# EAGLE board Display_01 (EAGLE 5.07)
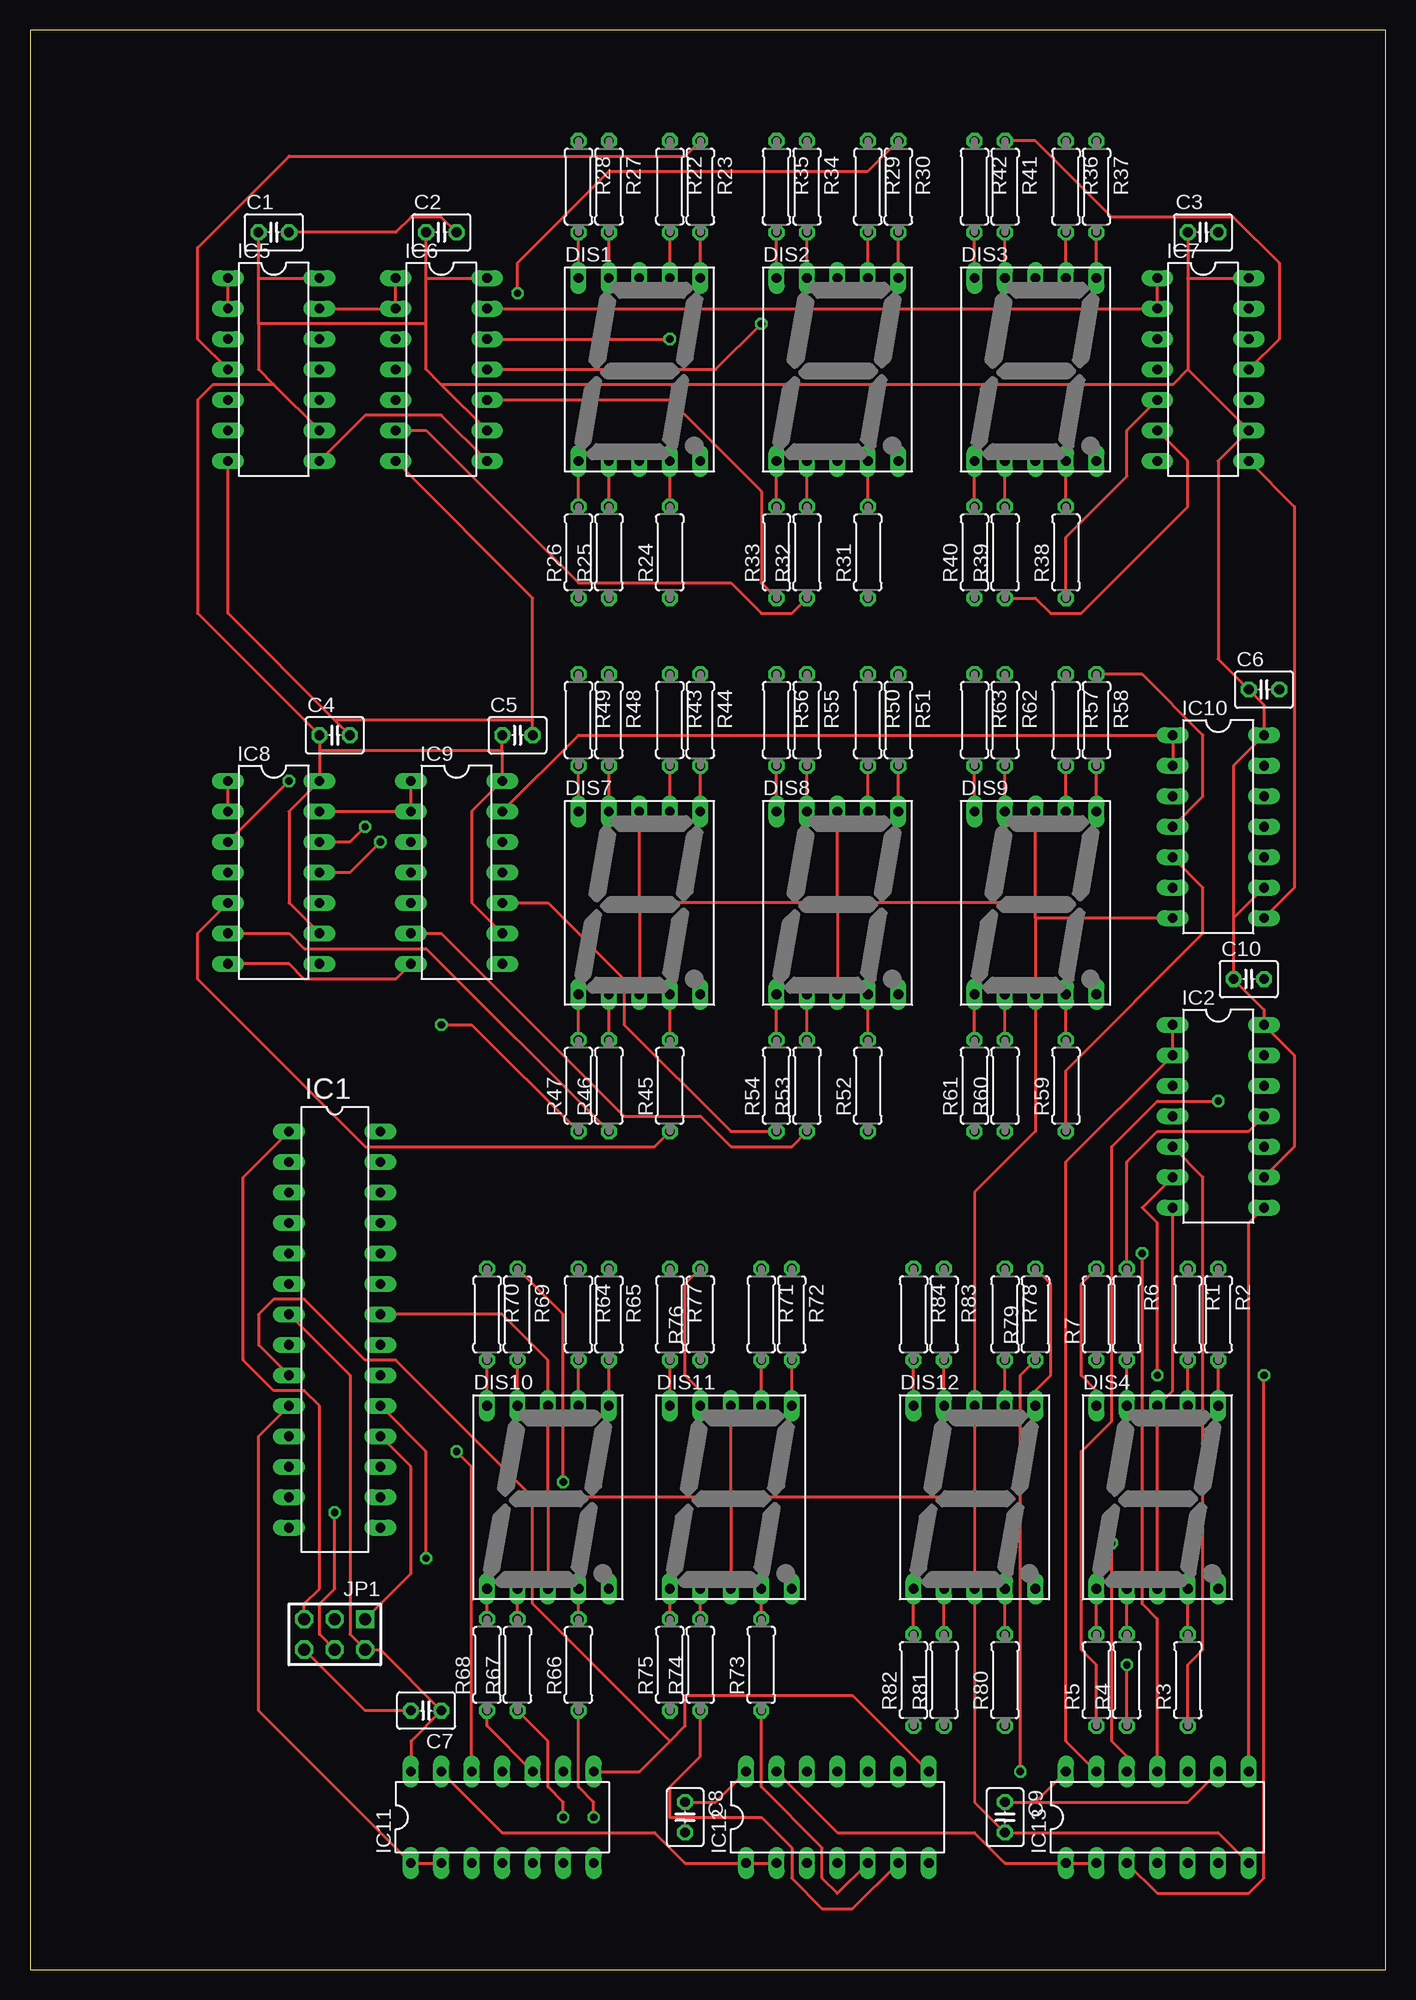
[diagram p0: board, top side]
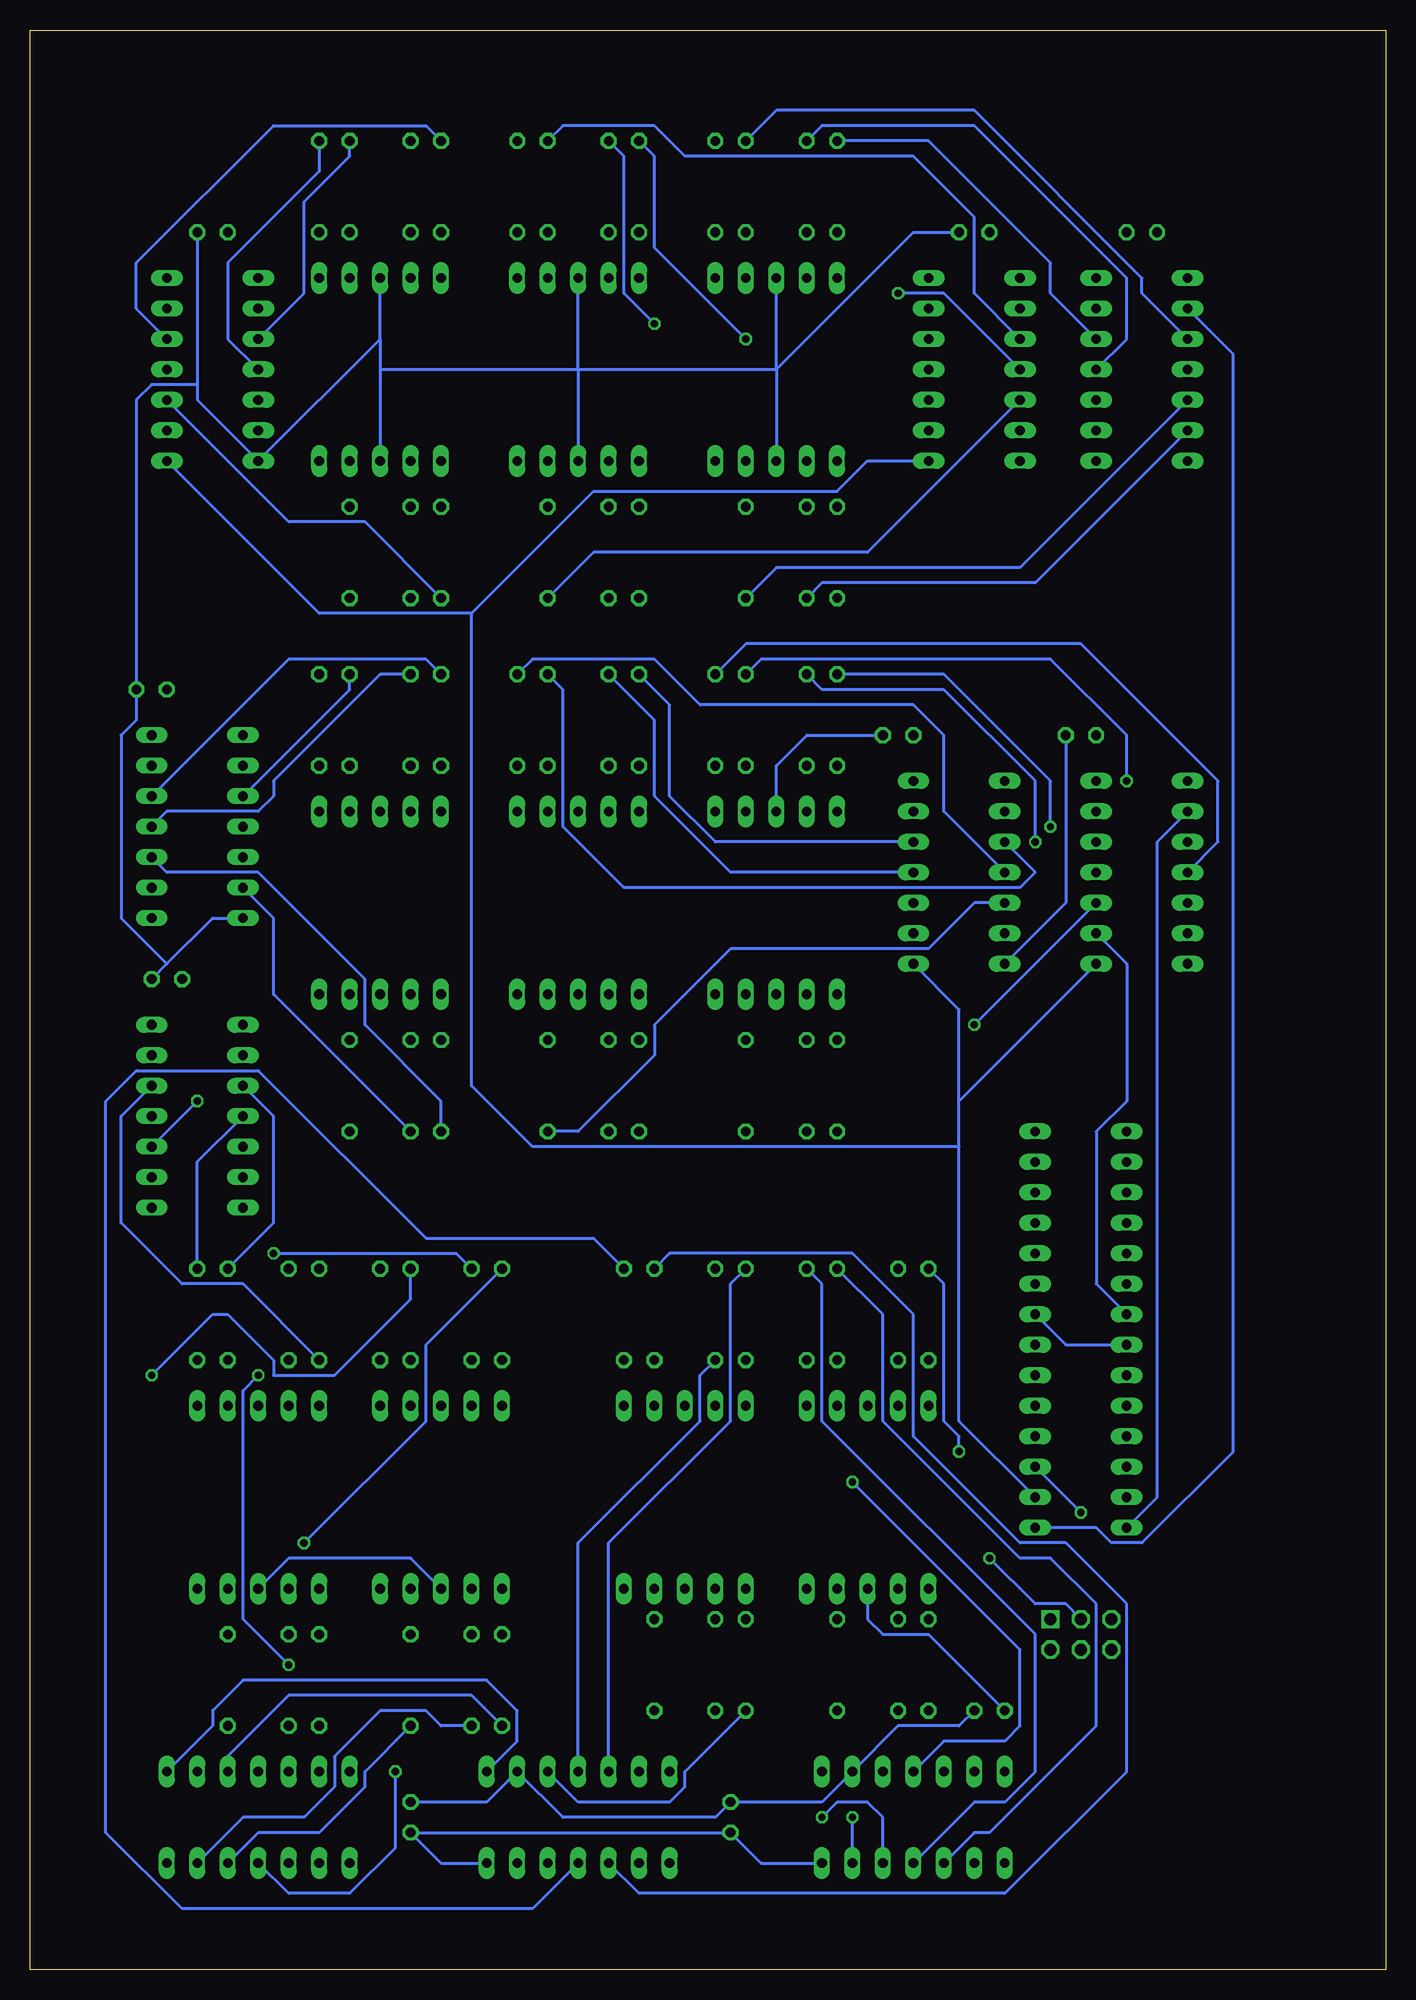
[diagram p1: board, bottom side, seen from below]

Size 113.01 x 161.64 mm. Coordinates in mm from the lower left corner, seen from the top.
Outline: 0,0 113.01,0 113.01,161.64 0,161.64 0,0
Copper layers (1*16): Top 0.035mm / dielectric 1.5mm / Bottom 0.035mm
Design rules "default *": minimum track width 10mil, minimum drill 24mil, track to track 15mil, track to pad 15mil, pad to pad 15mil, via to via 15mil, smd to smd 8mil, copper to edge 40mil, drill to drill 8mil, minimum pad ring 10mil, minimum via ring 8mil, stop-mask expansion 4mil, vias tented up to drill 0mil, thermal gap 10mil

## Footprints (pad centres in the part's own frame; a part is rotated, then mirrored left to right if it is on the bottom)
C025-030X050 = drill 0.813 octagon: 1 -1.27,0; 2 1.27,0
HDSP-M = drill 0.813 long: 1 -5.08,-7.62; 2 -2.54,-7.62; 3 0,-7.62; 4 2.54,-7.62; 5 5.08,-7.62; 6 5.08,7.62; 7 2.54,7.62; 8 0,7.62; 9 -2.54,7.62; 10 -5.08,7.62
DIL28-3 = drill 0.813 long: 1 -16.51,-3.81; 2 -13.97,-3.81; 3 -11.43,-3.81; 4 -8.89,-3.81; 5 -6.35,-3.81; 6 -3.81,-3.81; 7 -1.27,-3.81; 8 1.27,-3.81; 9 3.81,-3.81; 10 6.35,-3.81; 11 8.89,-3.81; 12 11.43,-3.81; 13 13.97,-3.81; 14 16.51,-3.81; 15 16.51,3.81; 16 13.97,3.81; 17 11.43,3.81; 18 8.89,3.81; 19 6.35,3.81; 20 3.81,3.81; 21 1.27,3.81; 22 -1.27,3.81; 23 -3.81,3.81; 24 -6.35,3.81; 25 -8.89,3.81; 26 -11.43,3.81; 27 -13.97,3.81; 28 -16.51,3.81
DIL14 = drill 0.813 long: 1 -7.62,-3.81; 2 -5.08,-3.81; 3 -2.54,-3.81; 4 0,-3.81; 5 2.54,-3.81; 6 5.08,-3.81; 7 7.62,-3.81; 8 7.62,3.81; 9 5.08,3.81; 10 2.54,3.81; 11 0,3.81; 12 -2.54,3.81; 13 -5.08,3.81; 14 -7.62,3.81
AVR-ISP-6 = drill 1.016 square: 1 -2.54,-1.27 | drill 1.016 octagon: 2 -2.54,1.27; 3 0,-1.27; 4 0,1.27; 5 2.54,-1.27; 6 2.54,1.27
0207/7 = drill 0.813 octagon: 1 -3.81,0; 2 3.81,0

## Placement (x,y rotation side)
C1  [C025-030X050]  20.32,144.78 0 top
C2  [C025-030X050]  34.29,144.78 0 top
C3  [C025-030X050]  97.79,144.78 0 top
C4  [C025-030X050]  25.4,102.87 0 top
C5  [C025-030X050]  40.64,102.87 0 top
C6  [C025-030X050]  102.87,106.68 0 top
C7  [C025-030X050]  33.02,21.59 180 top
C8  [C025-030X050]  54.61,12.7 270 top
C9  [C025-030X050]  81.28,12.7 270 top
C10  [C025-030X050]  101.6,82.55 0 top
DIS1  HD-H103  [HDSP-M]  50.8,133.35 0 top
DIS2  HD-H103  [HDSP-M]  67.31,133.35 0 top
DIS3  HD-H103  [HDSP-M]  83.82,133.35 0 top
DIS4  HD-H103  [HDSP-M]  93.98,39.37 0 top
DIS7  HD-H103  [HDSP-M]  50.8,88.9 0 top
DIS8  HD-H103  [HDSP-M]  67.31,88.9 0 top
DIS9  HD-H103  [HDSP-M]  83.82,88.9 0 top
DIS10  HD-H103  [HDSP-M]  43.18,39.37 0 top
DIS11  HD-H103  [HDSP-M]  58.42,39.37 0 top
DIS12  HD-H103  [HDSP-M]  78.74,39.37 0 top
IC1  ATMEGA48/88/168-PU  [DIL28-3]  25.4,53.34 270 top
IC2  74LS164N  [DIL14]  99.06,71.12 270 top
IC5  74LS164N  [DIL14]  20.32,133.35 270 top
IC6  74LS164N  [DIL14]  34.29,133.35 270 top
IC7  74LS164N  [DIL14]  97.79,133.35 270 top
IC8  74LS164N  [DIL14]  20.32,91.44 270 top
IC9  74LS164N  [DIL14]  35.56,91.44 270 top
IC10  74LS164N  [DIL14]  99.06,95.25 270 top
IC11  74LS164N  [DIL14]  39.37,12.7 0 top
IC12  74LS164N  [DIL14]  67.31,12.7 0 top
IC13  74LS164N  [DIL14]  93.98,12.7 0 top
JP1  AVR-ISP-6  [AVR-ISP-6]  25.4,27.94 180 top
R1  [0207/7]  96.52,54.61 270 top
R2  [0207/7]  99.06,54.61 270 top
R3  [0207/7]  96.52,24.13 90 top
R4  [0207/7]  91.44,24.13 90 top
R5  [0207/7]  88.9,24.13 90 top
R6  [0207/7]  91.44,54.61 270 top
R7  [0207/7]  88.9,54.61 90 top
R22  [0207/7]  53.34,148.59 270 top
R23  [0207/7]  55.88,148.59 270 top
R24  [0207/7]  53.34,118.11 90 top
R25  [0207/7]  48.26,118.11 90 top
R26  [0207/7]  45.72,118.11 90 top
R27  [0207/7]  48.26,148.59 270 top
R28  [0207/7]  45.72,148.59 270 top
R29  [0207/7]  69.85,148.59 270 top
R30  [0207/7]  72.39,148.59 270 top
R31  [0207/7]  69.85,118.11 90 top
R32  [0207/7]  64.77,118.11 90 top
R33  [0207/7]  62.23,118.11 90 top
R34  [0207/7]  64.77,148.59 270 top
R35  [0207/7]  62.23,148.59 270 top
R36  [0207/7]  86.36,148.59 270 top
R37  [0207/7]  88.9,148.59 270 top
R38  [0207/7]  86.36,118.11 90 top
R39  [0207/7]  81.28,118.11 90 top
R40  [0207/7]  78.74,118.11 90 top
R41  [0207/7]  81.28,148.59 270 top
R42  [0207/7]  78.74,148.59 270 top
R43  [0207/7]  53.34,104.14 270 top
R44  [0207/7]  55.88,104.14 270 top
R45  [0207/7]  53.34,73.66 90 top
R46  [0207/7]  48.26,73.66 90 top
R47  [0207/7]  45.72,73.66 90 top
R48  [0207/7]  48.26,104.14 270 top
R49  [0207/7]  45.72,104.14 270 top
R50  [0207/7]  69.85,104.14 270 top
R51  [0207/7]  72.39,104.14 270 top
R52  [0207/7]  69.85,73.66 90 top
R53  [0207/7]  64.77,73.66 90 top
R54  [0207/7]  62.23,73.66 90 top
R55  [0207/7]  64.77,104.14 270 top
R56  [0207/7]  62.23,104.14 270 top
R57  [0207/7]  86.36,104.14 270 top
R58  [0207/7]  88.9,104.14 270 top
R59  [0207/7]  86.36,73.66 90 top
R60  [0207/7]  81.28,73.66 90 top
R61  [0207/7]  78.74,73.66 90 top
R62  [0207/7]  81.28,104.14 270 top
R63  [0207/7]  78.74,104.14 270 top
R64  [0207/7]  45.72,54.61 270 top
R65  [0207/7]  48.26,54.61 270 top
R66  [0207/7]  45.72,25.4 90 top
R67  [0207/7]  40.64,25.4 90 top
R68  [0207/7]  38.1,25.4 90 top
R69  [0207/7]  40.64,54.61 270 top
R70  [0207/7]  38.1,54.61 270 top
R71  [0207/7]  60.96,54.61 270 top
R72  [0207/7]  63.5,54.61 270 top
R73  [0207/7]  60.96,25.4 90 top
R74  [0207/7]  55.88,25.4 90 top
R75  [0207/7]  53.34,25.4 90 top
R76  [0207/7]  55.88,54.61 90 top
R77  [0207/7]  53.34,54.61 270 top
R78  [0207/7]  81.28,54.61 270 top
R79  [0207/7]  83.82,54.61 90 top
R80  [0207/7]  81.28,24.13 90 top
R81  [0207/7]  76.2,24.13 90 top
R82  [0207/7]  73.66,24.13 90 top
R83  [0207/7]  76.2,54.61 270 top
R84  [0207/7]  73.66,54.61 270 top

## Library data of the parts
C1-C10 = rcl
DIS1-DIS4 DIS7-DIS12 = display-hp
IC1 = atmega8
IC2 IC5-IC13 = 74xx-eu
JP1 = avr-6
R1-R7 R22-R84 = resistor

## Nets
+5V: C1.1 C2.1 C3.1 C4.1 C5.1 C6.1 C7.1 C8.1 C9.1 C10.1 IC1.7 IC2.9 IC2.14 IC5.9 IC5.14 IC6.9 IC6.14 IC7.9 IC7.14 IC8.9 IC8.14 IC9.9 IC9.14 IC10.9 IC10.14 IC11.9 IC11.14 IC12.9 IC12.14 IC13.9 IC13.14 JP1.2
GND: C1.2 C2.2 C3.2 C4.2 C5.2 C6.2 C7.2 C8.2 C9.2 C10.2 DIS1.3 DIS1.8 DIS2.3 DIS2.8 DIS3.3 DIS3.8 DIS4.3 DIS4.8 DIS7.3 DIS7.8 DIS8.3 DIS8.8 DIS9.3 DIS9.8 DIS10.3 DIS10.8 DIS11.3 DIS11.8 DIS12.3 DIS12.8 IC1.8 IC1.22 IC2.7 IC5.7 IC6.7 IC7.7 IC8.7 IC9.7 IC10.7 IC11.7 IC12.7 IC13.7 JP1.6
N$1: IC2.1 IC2.2 IC13.13
N$2: IC2.6 R4.1
N$3: IC2.5 R3.1
N$4: IC2.4 R2.1
N$5: IC2.3 R1.1
N$6: IC2.10 R5.1
N$7: IC2.12 R7.1
N$8: IC2.11 R6.1
N$9: IC1.19 JP1.3
N$10: IC11.10 R68.1
N$11: DIS4.7 R1.2
N$12: DIS4.6 R2.2
N$13: DIS4.4 R3.2
N$14: DIS4.2 R4.2
N$15: DIS4.1 R5.2
N$16: DIS4.9 R6.2
N$17: DIS4.10 R7.2
N$18: IC1.17 JP1.4
N$19: IC1.18 JP1.1
N$20: IC1.15 IC5.1 IC5.2
N$21: IC1.1 JP1.5
N$22: IC1.9 IC2.8 IC11.8 IC12.8 IC13.8
N$23: IC1.10 IC11.1 IC11.2
N$24: IC8.10 R47.1
N$25: IC8.13 IC9.1 IC9.2
N$33: IC5.6 R25.1
N$50: IC5.5 R24.1
N$52: IC5.4 R23.1
N$53: IC5.3 R22.1
N$55: IC5.12 R28.1
N$56: IC5.11 R27.1
N$57: DIS1.7 R22.2
N$58: DIS1.6 R23.2
N$59: DIS1.4 R24.2
N$60: DIS1.2 R25.2
N$61: DIS1.1 R26.2
N$62: DIS1.9 R27.2
N$63: DIS1.10 R28.2
N$64: IC5.13 IC6.1 IC6.2
N$65: IC1.14 IC8.1 IC8.2
N$66: IC8.6 R46.1
N$67: IC6.6 R32.1
N$68: IC6.5 R31.1
N$69: IC6.4 R30.1
N$70: IC6.3 R29.1
N$71: IC6.10 R33.1
N$72: IC6.12 R35.1
N$73: IC6.11 R34.1
N$74: IC6.13 IC7.1 IC7.2
N$75: IC8.5 R45.1
N$76: IC8.4 R44.1
N$77: DIS2.7 R29.2
N$78: DIS2.6 R30.2
N$79: DIS2.4 R31.2
N$80: DIS2.2 R32.2
N$81: DIS2.1 R33.2
N$82: DIS2.9 R34.2
N$83: DIS2.10 R35.2
N$84: IC7.6 R39.1
N$85: IC7.5 R38.1
N$86: IC7.4 R37.1
N$87: IC7.3 R36.1
N$88: IC7.10 R40.1
N$89: IC7.12 R42.1
N$90: IC7.11 R41.1
N$92: IC8.3 R43.1
N$93: IC1.16 IC5.8 IC6.8 IC7.8 IC8.8 IC9.8 IC10.8
N$94: DIS3.7 R36.2
N$95: DIS3.6 R37.2
N$96: DIS3.4 R38.2
N$97: DIS3.2 R39.2
N$98: DIS3.1 R40.2
N$99: DIS3.9 R41.2
N$100: DIS3.10 R42.2
N$102: IC8.12 R49.1
N$103: IC8.11 R48.1
N$106: DIS7.7 R43.2
N$107: DIS7.6 R44.2
N$108: DIS7.4 R45.2
N$109: DIS7.2 R46.2
N$110: DIS7.1 R47.2
N$111: DIS7.9 R48.2
N$112: DIS7.10 R49.2
N$113: IC9.6 R53.1
N$114: IC9.5 R52.1
N$115: IC9.4 R51.1
N$116: IC9.3 R50.1
N$117: IC9.10 R54.1
N$118: IC9.12 R56.1
N$119: IC9.11 R55.1
N$120: IC9.13 IC10.1 IC10.2
N$121: DIS8.7 R50.2
N$122: DIS8.6 R51.2
N$123: DIS8.4 R52.2
N$124: DIS8.2 R53.2
N$125: DIS8.1 R54.2
N$126: DIS8.9 R55.2
N$127: DIS8.10 R56.2
N$128: IC10.6 R60.1
N$129: IC10.5 R59.1
N$130: IC10.4 R58.1
N$131: IC10.3 R57.1
N$132: IC10.10 R61.1
N$133: IC10.12 R63.1
N$134: IC10.11 R62.1
N$137: DIS9.7 R57.2
N$138: DIS9.6 R58.2
N$139: DIS9.4 R59.2
N$140: DIS9.2 R60.2
N$141: DIS9.1 R61.2
N$142: DIS9.9 R62.2
N$143: DIS9.10 R63.2
N$144: IC11.6 R67.1
N$145: IC11.5 R66.1
N$146: IC11.4 R65.1
N$147: IC11.3 R64.1
N$149: IC11.12 R70.1
N$150: IC11.11 R69.1
N$151: IC11.13 IC12.1 IC12.2
N$153: DIS10.7 R64.2
N$154: DIS10.6 R65.2
N$155: DIS10.4 R66.2
N$156: DIS10.2 R67.2
N$157: DIS10.1 R68.2
N$158: DIS10.9 R69.2
N$159: DIS10.10 R70.2
N$160: IC12.6 R74.1
N$161: IC12.5 R73.1
N$162: IC12.4 R72.1
N$163: IC12.3 R71.1
N$164: IC12.10 R75.1
N$165: IC12.12 R77.1
N$166: IC12.11 R76.1
N$167: IC12.13 IC13.1 IC13.2
N$168: DIS11.7 R71.2
N$169: DIS11.6 R72.2
N$170: DIS11.4 R73.2
N$171: DIS11.2 R74.2
N$172: DIS11.1 R75.2
N$173: DIS11.9 R76.2
N$174: DIS11.10 R77.2
N$175: IC13.6 R81.1
N$176: IC13.5 R80.1
N$177: IC13.4 R79.1
N$178: IC13.3 R78.1
N$179: IC13.10 R82.1
N$180: IC13.12 R84.1
N$181: IC13.11 R83.1
N$184: DIS12.7 R78.2
N$185: DIS12.6 R79.2
N$186: DIS12.4 R80.2
N$187: DIS12.2 R81.2
N$188: DIS12.1 R82.2
N$189: DIS12.9 R83.2
N$190: DIS12.10 R84.2

## Tracks (layer width: path | path; a pad name or v marks a point on that pad's centre or on a via)
+5V
  Top 0.254: 96.52,133.35 IC7.9 99.06,125.73 99.06,109.22 C6.1 102.87,105.41 IC10.14 100.33,100.33 100.33,87.63 | C3.1 96.52,140.97 | 96.52,140.97 96.52,133.35 | 96.52,140.97 IC7.14 | IC2.9 105.41,68.58 105.41,76.2 IC2.14 102.87,80.01 C10.1 100.33,87.63 | 100.33,87.63 IC10.9 | IC8.9 21.59,88.9 21.59,96.52 IC8.14 24.13,101.6 | 24.13,101.6 C4.1 13.97,113.03 13.97,130.81 15.24,132.08 20.32,132.08 | IC9.9 36.83,88.9 36.83,96.52 IC9.14 39.37,101.6 | 39.37,101.6 C5.1 | 24.13,101.6 39.37,101.6 | 20.32,132.08 19.05,133.35 19.05,137.16 | 20.32,132.08 IC5.9 | 19.05,140.97 C1.1 | 19.05,137.16 19.05,140.97 | 19.05,140.97 IC5.14 | 34.29,132.08 33.02,133.35 33.02,137.16 | 34.29,132.08 IC6.9 | 33.02,140.97 C2.1 | 33.02,137.16 33.02,140.97 | 33.02,140.97 IC6.14 | 33.02,137.16 19.05,137.16 | C9.1 83.82,13.97 | 83.82,13.97 IC13.14 | IC13.9 96.52,13.97 83.82,13.97 | C8.1 57.15,13.97 IC12.14 | IC11.14 31.75,19.05 C7.1 29.21,26.67 JP1.2 26.67,27.94 26.67,49.53 IC1.7 | 96.52,133.35 95.25,132.08 34.29,132.08
  Bottom 0.254: C9.1 74.93,13.97 IC12.9 68.58,12.7 55.88,12.7 C8.1 46.99,13.97 IC11.9 40.64,20.32 35.56,20.32 C7.1 | IC8.9 21.59,83.82 21.59,72.39 24.13,69.85 24.13,57.15 IC1.7
GND
  Top 0.254: IC13.7 99.06,11.43 C9.2 78.74,13.97 DIS12.3 78.74,39.37 | DIS4.3 DIS4.8 95.25,48.26 IC2.7 | 78.74,39.37 DIS12.8 78.74,64.77 83.82,69.85 DIS9.3 83.82,87.63 | 58.42,39.37 DIS11.8 | 58.42,39.37 DIS11.3 | C7.2 27.94,21.59 JP1.6 | 43.18,39.37 DIS10.8 43.18,50.8 39.37,54.61 IC1.22 | 43.18,39.37 DIS10.3 | 58.42,39.37 43.18,39.37 | 78.74,39.37 58.42,39.37 | C1.2 30.48,144.78 31.75,146.05 34.29,146.05 C2.2 | 41.91,104.14 41.91,114.3 IC6.7 | C5.2 41.91,104.14 | IC8.7 21.59,83.82 22.86,82.55 30.48,82.55 IC9.7 | IC5.7 16.51,113.03 25.4,104.14 | 25.4,104.14 C4.2 | 41.91,104.14 25.4,104.14 | 50.8,88.9 DIS7.8 | 50.8,88.9 DIS7.3 | 67.31,88.9 DIS8.8 | 67.31,88.9 DIS8.3 | 67.31,88.9 50.8,88.9 | 83.82,88.9 DIS9.8 | 83.82,87.63 83.82,88.9 | IC10.7 83.82,87.63 | 83.82,88.9 67.31,88.9
  Bottom 0.254: IC11.7 52.07,8.89 C8.2 C9.2 78.74,8.89 IC12.7 | IC1.8 26.67,52.07 IC1.22 | C7.2 38.1,27.94 41.91,27.94 43.18,29.21 DIS10.3 | DIS4.3 91.44,34.29 81.28,34.29 DIS12.3 | 83.82,135.89 DIS3.8 | 83.82,135.89 83.82,133.35 | 83.82,133.35 DIS3.3 | 83.82,135.89 IC7.7 99.06,130.81 99.06,132.08 | C3.2 99.06,132.08 | 67.31,133.35 DIS2.8 | 67.31,133.35 DIS2.3 | 50.8,133.35 DIS1.8 | 50.8,133.35 DIS1.3 | C2.2 39.37,144.78 50.8,133.35 | 67.31,133.35 50.8,133.35 | 83.82,133.35 67.31,133.35 | C4.2 26.67,88.9 IC9.7 | 101.6,83.82 97.79,87.63 IC10.7 | 101.6,83.82 C10.2 | 101.6,83.82 105.41,87.63 105.41,102.87 104.14,104.14 C6.2 104.14,130.81 102.87,132.08 99.06,132.08 | C5.2 48.26,102.87 50.8,100.33 DIS7.8
N$1
  Top 0.254: IC13.13 86.36,19.05 86.36,67.31 IC2.2 IC2.1
N$2  (via drill 0.61)
  Top 0.254: R4.1 v91.44,25.4 | v93.98,49.53 93.98,62.23 92.71,63.5 IC2.6
  Bottom 0.254: v91.44,25.4 95.25,29.21 95.25,48.26 v93.98,49.53
N$3
  Top 0.254: R3.1 96.52,25.4 97.79,26.67 97.79,66.04 IC2.5
N$4
  Bottom 0.254: R2.1 99.06,67.31 IC2.4
N$5
  Bottom 0.254: R1.1 92.71,62.23 92.71,71.12 IC2.3
N$6  (via drill 0.61)
  Top 0.254: R5.1 88.9,25.4 87.63,26.67 87.63,43.18 90.17,45.72 90.17,68.58 93.98,72.39 v99.06,72.39
  Bottom 0.254: v99.06,72.39 IC2.10
N$7
  Bottom 0.254: R7.1 95.25,57.15 100.33,57.15 105.41,62.23 105.41,71.12 IC2.12
N$8
  Top 0.254: R6.1 91.44,67.31 93.98,69.85 101.6,69.85 IC2.11
N$9  (via drill 0.61)
  Top 0.254: IC1.19 33.02,43.18 v33.02,34.29
  Bottom 0.254: v33.02,34.29 29.21,30.48 26.67,30.48 JP1.3
N$10
  Top 0.254: IC11.10 38.1,20.32 R68.1
N$11
  Top 0.254: DIS4.7 R1.2
N$12
  Top 0.254: DIS4.6 R2.2
N$13
  Top 0.254: R3.2 DIS4.4
N$14
  Top 0.254: R4.2 DIS4.2
N$15
  Top 0.254: R5.2 DIS4.1
N$16
  Top 0.254: DIS4.9 R6.2
N$17
  Top 0.254: DIS4.10 88.9,48.26 87.63,49.53 87.63,57.15 R7.2
N$18  (via drill 0.61)
  Top 0.254: v25.4,38.1 25.4,31.75 24.13,30.48 24.13,27.94 JP1.4
  Bottom 0.254: v25.4,38.1 IC1.17
N$19
  Top 0.254: IC1.18 31.75,41.91 31.75,33.02 JP1.1
N$20
  Top 0.254: IC5.2 IC5.1
  Bottom 0.254: IC1.15 24.13,36.83 22.86,35.56 20.32,35.56 12.7,43.18 12.7,134.62 IC5.2
N$21
  Top 0.254: IC1.1 17.78,66.04 17.78,50.8 20.32,48.26 22.86,48.26 24.13,46.99 24.13,31.75 22.86,30.48 JP1.5
N$22
  Top 0.254: IC13.8 101.6,62.23 IC2.8 | IC11.8 50.8,16.51 53.34,19.05 | 53.34,19.05 54.61,20.32 54.61,22.86 68.58,22.86 IC12.8 | IC1.9 19.05,52.07 19.05,54.61 20.32,55.88 22.86,55.88 27.94,50.8 30.48,50.8 41.91,39.37 41.91,30.48 53.34,19.05
  Bottom 0.254: IC13.8 97.79,20.32 97.79,21.59 95.25,24.13 74.93,24.13 72.39,21.59 72.39,19.05 IC12.8
N$23
  Top 0.254: IC11.2 IC11.1 19.05,21.59 19.05,44.45 IC1.10
N$24  (via drill 0.61)
  Top 0.254: v34.29,78.74 36.83,78.74 R47.1
  Bottom 0.254: IC8.10 v34.29,78.74
N$25
  Top 0.254: IC8.13 IC9.2 IC9.1
N$33
  Bottom 0.254: IC5.6 29.21,115.57 46.99,115.57 R25.1
N$50
  Bottom 0.254: IC5.5 30.48,116.84 50.8,116.84 R24.1
N$52
  Top 0.254: IC5.4 13.97,135.89 13.97,143.51 21.59,151.13 54.61,151.13 R23.1
N$53
  Bottom 0.254: IC5.3 20.32,139.7 20.32,140.97 34.29,154.94 50.8,154.94 R22.1
N$55
  Bottom 0.254: IC5.12 27.94,139.7 27.94,142.24 38.1,152.4 R28.1
N$56
  Bottom 0.254: IC5.11 21.59,135.89 21.59,140.97 34.29,153.67 46.99,153.67 R27.1
N$57
  Top 0.254: DIS1.7 R22.2
N$58
  Top 0.254: DIS1.6 R23.2
N$59
  Top 0.254: R24.2 DIS1.4
N$60
  Top 0.254: R25.2 DIS1.2
N$61
  Top 0.254: R26.2 DIS1.1
N$62
  Top 0.254: DIS1.9 R27.2
N$63
  Top 0.254: DIS1.10 R28.2
N$64
  Top 0.254: IC5.13 IC6.2 IC6.1
N$65
  Top 0.254: IC8.2 IC8.1
  Bottom 0.254: IC1.14 19.05,39.37 19.05,93.98 IC8.2
N$66
  Top 0.254: IC8.6 21.59,86.36 22.86,85.09 33.02,85.09 R46.1
N$67
  Top 0.254: IC6.6 33.02,128.27 45.72,115.57 58.42,115.57 60.96,113.03 63.5,113.03 R32.1
N$68
  Bottom 0.254: IC6.5 43.18,118.11 66.04,118.11 R31.1
N$69  (via drill 0.61)
  Top 0.254: v40.64,139.7 40.64,142.24 48.26,149.86 69.85,149.86 R30.1
  Bottom 0.254: IC6.4 36.83,139.7 v40.64,139.7
N$70
  Bottom 0.254: IC6.3 34.29,139.7 34.29,146.05 39.37,151.13 58.42,151.13 60.96,153.67 68.58,153.67 R29.1
N$71
  Top 0.254: IC6.10 53.34,130.81 60.96,123.19 60.96,115.57 R33.1
N$72  (via drill 0.61)
  Top 0.254: IC6.12 v53.34,135.89
  Bottom 0.254: v53.34,135.89 60.96,143.51 60.96,151.13 R35.1
N$73  (via drill 0.61)
  Top 0.254: IC6.11 57.15,133.35 v60.96,137.16
  Bottom 0.254: v60.96,137.16 63.5,139.7 63.5,151.13 R34.1
N$74
  Top 0.254: IC6.13 IC7.2 IC7.1
N$75
  Top 0.254: IC8.5 13.97,86.36 13.97,82.55 27.94,68.58 52.07,68.58 R45.1
N$76
  Bottom 0.254: IC8.4 13.97,93.98 13.97,99.06 25.4,110.49 53.34,110.49 R44.1
N$77
  Top 0.254: DIS2.7 R29.2
N$78
  Top 0.254: DIS2.6 R30.2
N$79
  Top 0.254: R31.2 DIS2.4
N$80
  Top 0.254: R32.2 DIS2.2
N$81
  Top 0.254: R33.2 DIS2.1
N$82
  Top 0.254: DIS2.9 R34.2
N$83
  Top 0.254: DIS2.10 R35.2
N$84
  Top 0.254: R39.1 83.82,114.3 85.09,113.03 87.63,113.03 96.52,121.92 96.52,125.73 IC7.6
N$85
  Top 0.254: R38.1 86.36,119.38 91.44,124.46 91.44,128.27 IC7.5
N$86
  Bottom 0.254: R37.1 88.9,149.86 96.52,142.24 96.52,135.89 IC7.4
N$87
  Bottom 0.254: IC7.3 90.17,139.7 90.17,147.32 86.36,151.13 R36.1
N$88
  Bottom 0.254: R40.1 85.09,120.65 91.44,120.65 IC7.10
N$89
  Bottom 0.254: R42.1 80.01,153.67 92.71,153.67 104.14,142.24 104.14,138.43 IC7.12
N$90
  Top 0.254: R41.1 83.82,152.4 90.17,146.05 100.33,146.05 104.14,142.24 104.14,135.89 IC7.11
N$92  (via drill 0.61)
  Top 0.254: IC8.3 v21.59,99.06
  Bottom 0.254: v21.59,99.06 21.59,102.87 27.94,109.22 52.07,109.22 R43.1
N$93
  Top 0.254: IC5.8 27.94,129.54 34.29,129.54 IC6.8 | IC10.8 105.41,90.17 105.41,121.92 IC7.8
  Bottom 0.254: IC1.16 35.56,45.72 35.56,68.58 | 35.56,72.39 35.56,80.01 IC9.8 | 35.56,68.58 35.56,72.39 | 35.56,72.39 IC8.8 | IC6.8 43.18,125.73 45.72,123.19 66.04,123.19 76.2,113.03 | 76.2,113.03 88.9,113.03 IC7.8 | 35.56,68.58 71.12,68.58 76.2,73.66 76.2,113.03
N$94
  Top 0.254: DIS3.7 R36.2
N$95
  Top 0.254: DIS3.6 R37.2
N$96
  Top 0.254: R38.2 DIS3.4
N$97
  Top 0.254: R39.2 DIS3.2
N$98
  Top 0.254: R40.2 DIS3.1
N$99
  Top 0.254: DIS3.9 R41.2
N$100
  Top 0.254: DIS3.10 R42.2
N$102  (via drill 0.61)
  Top 0.254: IC8.12 26.67,93.98 v27.94,95.25
  Bottom 0.254: v27.94,95.25 27.94,99.06 36.83,107.95 R49.1
N$103  (via drill 0.61)
  Top 0.254: IC8.11 26.67,91.44 v29.21,93.98
  Bottom 0.254: v29.21,93.98 29.21,99.06 36.83,106.68 46.99,106.68 R48.1
N$106
  Top 0.254: DIS7.7 R43.2
N$107
  Top 0.254: DIS7.6 R44.2
N$108
  Top 0.254: R45.2 DIS7.4
N$109
  Top 0.254: R46.2 DIS7.2
N$110
  Top 0.254: R47.2 DIS7.1
N$111
  Top 0.254: DIS7.9 R48.2
N$112
  Top 0.254: DIS7.10 R49.2
N$113
  Top 0.254: IC9.6 34.29,86.36 49.53,71.12 55.88,71.12 58.42,68.58 63.5,68.58 R53.1
N$114
  Bottom 0.254: IC9.5 34.29,88.9 38.1,85.09 54.61,85.09 60.96,78.74 60.96,76.2 67.31,69.85 R52.1
N$115
  Bottom 0.254: IC9.4 36.83,96.52 36.83,102.87 39.37,105.41 57.15,105.41 60.96,109.22 71.12,109.22 R51.1
N$116
  Bottom 0.254: IC9.3 29.21,91.44 30.48,90.17 63.5,90.17 68.58,95.25 68.58,106.68 R50.1
N$117
  Top 0.254: IC9.10 43.18,88.9 49.53,82.55 49.53,78.74 58.42,69.85 R54.1
N$118
  Bottom 0.254: IC9.12 55.88,93.98 59.69,97.79 59.69,105.41 R56.1
N$119
  Bottom 0.254: IC9.11 54.61,91.44 60.96,97.79 60.96,104.14 R55.1
N$120
  Top 0.254: IC9.13 45.72,102.87 IC10.1 IC10.2
N$121
  Top 0.254: DIS8.7 R50.2
N$122
  Top 0.254: DIS8.6 R51.2
N$123
  Top 0.254: R52.2 DIS8.4
N$124
  Top 0.254: R53.2 DIS8.2
N$125
  Top 0.254: R54.2 DIS8.1
N$126
  Top 0.254: DIS8.9 R55.2
N$127
  Top 0.254: DIS8.10 R56.2
N$128
  Bottom 0.254: R60.1 92.71,81.28 92.71,87.63 IC10.6
N$129
  Top 0.254: R59.1 86.36,74.93 97.79,86.36 97.79,90.17 IC10.5
N$130
  Top 0.254: IC10.4 97.79,97.79 97.79,102.87 92.71,107.95 R58.1
N$131
  Bottom 0.254: IC10.3 86.36,106.68 R57.1
N$132
  Bottom 0.254: R61.1 78.74,72.39 85.09,78.74 85.09,82.55 93.98,91.44 101.6,91.44 IC10.10
N$133
  Bottom 0.254: R63.1 80.01,109.22 91.44,109.22 IC10.12
N$134
  Bottom 0.254: R62.1 83.82,107.95 92.71,99.06 92.71,97.79 93.98,96.52 101.6,96.52 IC10.11
N$137
  Top 0.254: DIS9.7 R57.2
N$138
  Top 0.254: DIS9.6 R58.2
N$139
  Top 0.254: R59.2 DIS9.4
N$140
  Top 0.254: R60.2 DIS9.2
N$141
  Top 0.254: R61.2 DIS9.1
N$142
  Top 0.254: DIS9.9 R62.2
N$143
  Top 0.254: DIS9.10 R63.2
N$144  (via drill 0.61)
  Top 0.254: v44.45,12.7 44.45,13.97 43.18,15.24 43.18,19.05 R67.1
  Bottom 0.254: IC11.6 v44.45,12.7
N$145  (via drill 0.61)
  Top 0.254: v46.99,12.7 46.99,13.97 45.72,15.24 R66.1
  Bottom 0.254: IC11.5 41.91,12.7 43.18,13.97 45.72,13.97 v46.99,12.7
N$146
  Bottom 0.254: IC11.4 34.29,13.97 31.75,13.97 29.21,16.51 29.21,27.94 46.99,45.72 46.99,57.15 R65.1
N$147
  Bottom 0.254: IC11.3 34.29,11.43 33.02,11.43 24.13,20.32 24.13,30.48 27.94,34.29 30.48,34.29 41.91,45.72 41.91,54.61 R64.1
N$149  (via drill 0.61)
  Top 0.254: IC11.12 36.83,41.91 v35.56,43.18
  Bottom 0.254: v35.56,43.18 35.56,44.45 36.83,45.72 36.83,57.15 R70.1
N$150  (via drill 0.61)
  Top 0.254: v44.45,40.64 44.45,54.61 R69.1
  Bottom 0.254: IC11.11 36.83,19.05 31.75,19.05 30.48,20.32 30.48,26.67 v44.45,40.64
N$151
  Top 0.254: IC11.13 39.37,11.43 52.07,11.43 54.61,8.89 IC12.1 IC12.2
N$153
  Top 0.254: DIS10.7 R64.2
N$154
  Top 0.254: DIS10.6 R65.2
N$155
  Top 0.254: R66.2 DIS10.4
N$156
  Top 0.254: R67.2 DIS10.2
N$157
  Top 0.254: R68.2 DIS10.1
N$158
  Top 0.254: DIS10.9 R69.2
N$159
  Top 0.254: DIS10.10 R70.2
N$160
  Top 0.254: R74.1 55.88,17.78 53.34,15.24 53.34,12.7 60.96,12.7 63.5,10.16 63.5,7.62 66.04,5.08 68.58,5.08 IC12.6
N$161
  Top 0.254: IC12.5 67.31,6.35 66.04,7.62 66.04,10.16 60.96,15.24 R73.1
N$162
  Bottom 0.254: IC12.4 71.12,5.08 100.33,5.08 106.68,11.43 106.68,72.39 104.14,74.93 93.98,74.93 80.01,60.96 66.04,60.96 R72.1
N$163
  Bottom 0.254: IC12.3 62.23,6.35 31.75,6.35 21.59,16.51 21.59,30.48 26.67,35.56 30.48,35.56 39.37,44.45 39.37,54.61 44.45,59.69 59.69,59.69 R71.1
N$164
  Bottom 0.254: R75.1 58.42,16.51 58.42,15.24 59.69,13.97 67.31,13.97 IC12.10
N$165
  Bottom 0.254: IC12.12 64.77,35.56 54.61,45.72 54.61,57.15 R77.1
N$166
  Bottom 0.254: IC12.11 67.31,35.56 57.15,45.72 57.15,49.53 R76.1
N$167
  Top 0.254: IC12.13 67.31,11.43 78.74,11.43 81.28,8.89 IC13.1 IC13.2
N$168
  Top 0.254: DIS11.7 R71.2
N$169
  Top 0.254: DIS11.6 R72.2
N$170
  Top 0.254: R73.2 DIS11.4
N$171
  Top 0.254: R74.2 DIS11.2
N$172
  Top 0.254: R75.2 DIS11.1
N$173
  Top 0.254: DIS11.9 55.88,48.26 54.61,49.53 54.61,57.15 R76.2
N$174
  Top 0.254: DIS11.10 R77.2
N$175
  Bottom 0.254: R81.1 78.74,20.32 80.01,21.59 83.82,21.59 87.63,17.78 87.63,15.24 90.17,12.7 95.25,12.7 IC13.6
N$176
  Bottom 0.254: R80.1 85.09,16.51 85.09,15.24 88.9,11.43 93.98,11.43 IC13.5
N$177  (via drill 0.61)
  Top 0.254: v82.55,16.51 82.55,49.53 R79.1
  Bottom 0.254: IC13.4 91.44,6.35 86.36,6.35 82.55,10.16 v82.55,16.51
N$178  (via drill 0.61)
  Top 0.254: IC13.3 93.98,6.35 101.6,6.35 102.87,7.62 v102.87,49.53
  Bottom 0.254: v102.87,49.53 97.79,54.61 96.52,54.61 92.71,50.8 92.71,49.53 87.63,49.53 81.28,55.88 R78.1
N$179
  Bottom 0.254: R82.1 76.2,22.86 91.44,22.86 96.52,17.78 IC13.10
N$180  (via drill 0.61)
  Top 0.254: IC13.12 91.44,17.78 90.17,19.05 v90.17,35.56
  Bottom 0.254: v90.17,35.56 80.01,45.72 80.01,52.07 R84.1
N$181  (via drill 0.61)
  Top 0.254: IC13.11 93.98,29.21 92.71,30.48 v92.71,59.69
  Bottom 0.254: v92.71,59.69 77.47,59.69 R83.1
N$184
  Top 0.254: DIS12.7 R78.2
N$185
  Top 0.254: DIS12.6 83.82,48.26 85.09,49.53 85.09,57.15 R79.2
N$186
  Top 0.254: R80.2 DIS12.4
N$187
  Top 0.254: R81.2 DIS12.2
N$188
  Top 0.254: R82.2 DIS12.1
N$189
  Top 0.254: DIS12.9 R83.2
N$190
  Top 0.254: DIS12.10 R84.2